# EAGLE board speakers2 (EAGLE 5.07)
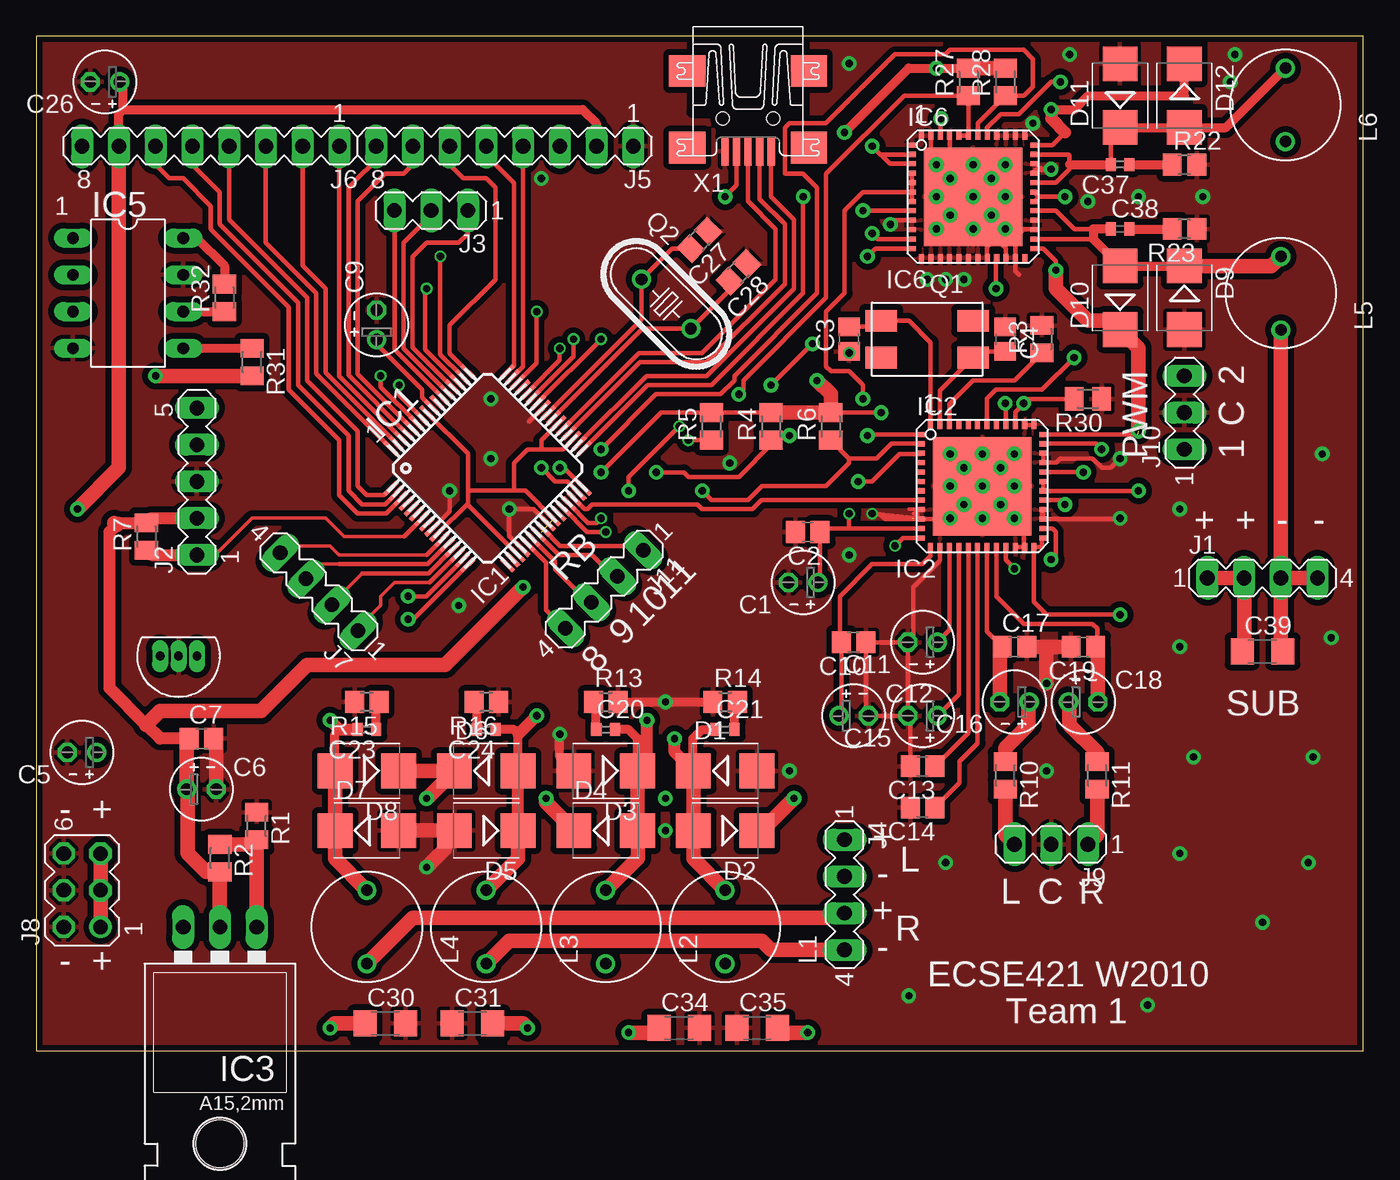
[diagram p0: board, top side]
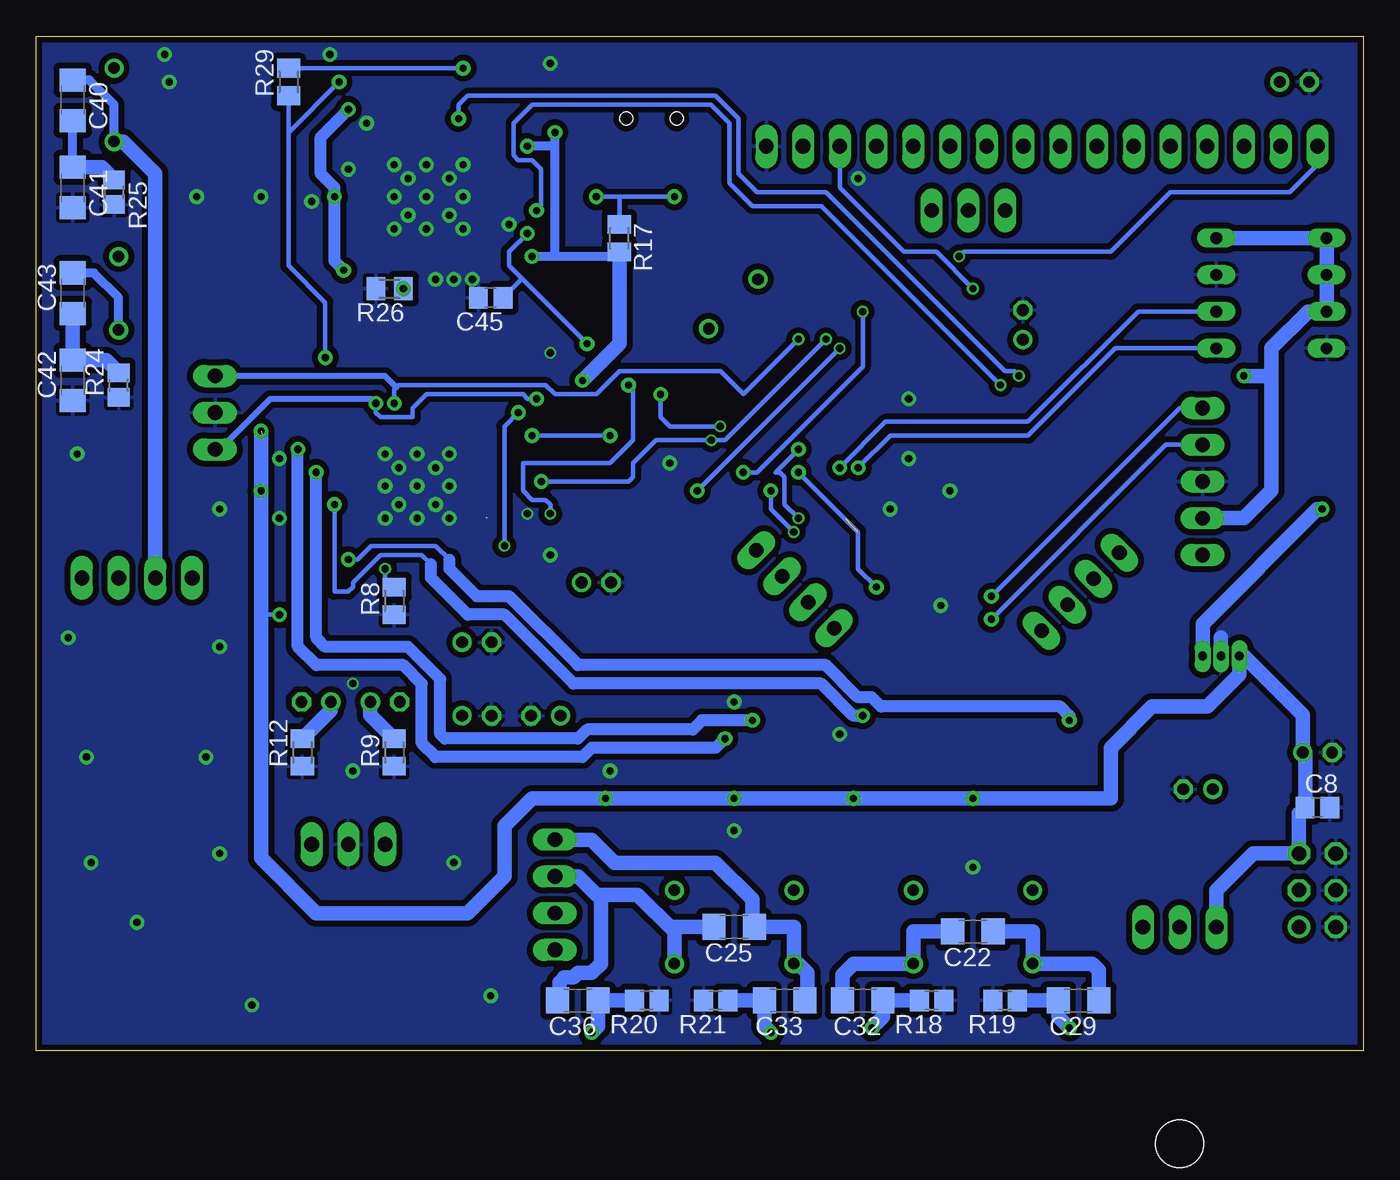
[diagram p1: board, bottom side, seen from below]

Size 91.75 x 70.16 mm. Coordinates in mm from the lower left corner, seen from the top.
Outline: 0,0 91.75,0 91.75,70.16 0,70.16 0,0
Copper layers (1*16): Top 0.035mm / dielectric 1.5mm / Bottom 0.035mm
Design rules "Fusion_eagle_rule_v1.1": minimum track width 6mil, minimum drill 12mil, track to track 6mil, track to pad 6mil, pad to pad 6mil, via to via 6mil, smd to smd 0mil, copper to edge 10mil, drill to drill 10mil, minimum pad ring 10mil, minimum via ring 6mil, stop-mask expansion 2mil, vias tented up to drill 100mil, thermal gap 10mil

## Footprints (pad centres in the part's own frame; a part is rotated, then mirrored left to right if it is on the bottom)
E2-4 = drill 0.813 pad 1.27 round: + -1.016,0 | drill 0.813 pad 1.27 octagon: - 1.016,0
C0805 = smd 1.3 x 1.5: 1 -0.85,0; 2 0.85,0
C0402 = smd 0.7 x 0.9: 1 -0.65,0; 2 0.65,0
C3216 = smd 1.6 x 1.8: 1 -1.4,0; 2 1.4,0
SMB = smd 2.4 x 2.4: A 2.2,0; C -2.2,0
TQFP64-10X10 = smd 1.2 x 0.3: 1 -5.7,3.75; 2 -5.7,3.25; 3 -5.7,2.75; 4 -5.7,2.25; 5 -5.7,1.75; 6 -5.7,1.25; 7 -5.7,0.75; 8 -5.7,0.25; 9 -5.7,-0.25; 10 -5.7,-0.75; 11 -5.7,-1.25; 12 -5.7,-1.75; 13 -5.7,-2.25; 14 -5.7,-2.75; 15 -5.7,-3.25; 16 -5.7,-3.75; 33 5.7,-3.75; 34 5.7,-3.25; 35 5.7,-2.75; 36 5.7,-2.25; 37 5.7,-1.75; 38 5.7,-1.25; 39 5.7,-0.75; 40 5.7,-0.25; 41 5.7,0.25; 42 5.7,0.75; 43 5.7,1.25; 44 5.7,1.75; 45 5.7,2.25; 46 5.7,2.75; 47 5.7,3.25; 48 5.7,3.75 | smd 0.3 x 1.2: 17 -3.75,-5.7; 18 -3.25,-5.7; 19 -2.75,-5.7; 20 -2.25,-5.7; 21 -1.75,-5.7; 22 -1.25,-5.7; 23 -0.75,-5.7; 24 -0.25,-5.7; 25 0.25,-5.7; 26 0.75,-5.7; 27 1.25,-5.7; 28 1.75,-5.7; 29 2.25,-5.7; 30 2.75,-5.7; 31 3.25,-5.7; 32 3.75,-5.7; 49 3.75,5.7; 50 3.25,5.7; 51 2.75,5.7; 52 2.25,5.7; 53 1.75,5.7; 54 1.25,5.7; 55 0.75,5.7; 56 0.25,5.7; 57 -0.25,5.7; 58 -0.75,5.7; 59 -1.25,5.7; 60 -1.75,5.7; 61 -2.25,5.7; 62 -2.75,5.7; 63 -3.25,5.7; 64 -3.75,5.7
QFN48-9X9 = smd 0.55 x 0.35: 1 -4.225,3.575; 2 -4.225,2.925; 3 -4.225,2.275; 4 -4.225,1.625; 5 -4.225,0.975; 6 -4.225,0.325; 7 -4.225,-0.325; 8 -4.225,-0.975; 9 -4.225,-1.625; 10 -4.225,-2.275; 11 -4.225,-2.925; 12 -4.225,-3.575; 25 4.225,-3.575; 26 4.225,-2.925; 27 4.225,-2.275; 28 4.225,-1.625; 29 4.225,-0.975; 30 4.225,-0.325; 31 4.225,0.325; 32 4.225,0.975; 33 4.225,1.625; 34 4.225,2.275; 35 4.225,2.925; 36 4.225,3.575 | smd 0.35 x 0.55: 13 -3.575,-4.225; 14 -2.925,-4.225; 15 -2.275,-4.225; 16 -1.625,-4.225; 17 -0.975,-4.225; 18 -0.325,-4.225; 19 0.325,-4.225; 20 0.975,-4.225; 21 1.625,-4.225; 22 2.275,-4.225; 23 2.925,-4.225; 24 3.575,-4.225; 37 3.575,4.225; 38 2.925,4.225; 39 2.275,4.225; 40 1.625,4.225; 41 0.975,4.225; 42 0.325,4.225; 43 -0.325,4.225; 44 -0.975,4.225; 45 -1.625,4.225; 46 -2.275,4.225; 47 -2.925,4.225; 48 -3.575,4.225 | smd 6.8 x 6.8: EPAD 0,0
TO220L1 = drill 1.016 long: 1 -2.54,-3.81; 2 0,-3.81; 3 2.54,-3.81 | hole 3.302: 0,11.176
TO-92 = drill 0.6 pad 0.813 long: 1 -1.27,0; 2 0,0; 3 1.27,0
DIL8 = drill 0.813 long: 1 -3.81,-3.81; 2 -1.27,-3.81; 3 1.27,-3.81; 4 3.81,-3.81; 5 3.81,3.81; 6 1.27,3.81; 7 -1.27,3.81; 8 -3.81,3.81
MA04-1 = drill 1.016 long: 1 -3.81,0; 2 -1.27,0; 3 1.27,0; 4 3.81,0
MA05-1 = drill 1.016 long: 1 -5.08,0; 2 -2.54,0; 3 0,0; 4 2.54,0; 5 5.08,0
MA03-1 = drill 1.016 long: 1 -2.54,0; 2 0,0; 3 2.54,0
MA08-1 = drill 1.016 long: 1 -8.89,0; 2 -6.35,0; 3 -3.81,0; 4 -1.27,0; 5 1.27,0; 6 3.81,0; 7 6.35,0; 8 8.89,0
MA03-2 = drill 1.016 round: 1 -2.54,-1.27 | drill 1.016 octagon: 2 -2.54,1.27; 3 0,-1.27; 4 0,1.27; 5 2.54,-1.27; 6 2.54,1.27
RLB9012 = drill 0.8 round: 1 0,2.54; 2 0,-2.54
12SMX-B = smd 2.2 x 1.5: P$1 -3.175,1.27; P$2 -3.175,-1.27; P$3 3.175,-1.27; P$4 3.175,1.27
HC49U-V = drill 0.813 round: 1 -2.413,0; 2 2.413,0
M0805 = smd 1.3 x 1.6: 1 -0.95,0; 2 0.95,0
R0805 = smd 1.3 x 1.5: 1 -0.85,0; 2 0.85,0
UX60-MB-5ST = smd 2 x 0.5: 1 2.25,1.6; 2 2.25,0.8; 3 2.25,0; 4 2.25,-0.8; 5 2.25,-1.6 | smd 2.2 x 2.5: M1 -3.3,-4.2; M2 -3.3,4.2; M3 2,4.2; M4 2,-4.2 | hole 0.9: 0,-1.75; 0,1.75

## Placement (x,y rotation side)
C1  [E2-4]  53.02,32.38 180 top
C2  [C0805]  53.34,35.88 180 top
C3  [C0805]  56.2,49.21 90 top
C4  [C0805]  66.99,49.21 270 top
C5  [E2-4]  3.17,20.64 180 top
C6  [E2-4]  11.43,18.1 0 top
C7  [C0805]  11.43,21.59 0 top
C8  [C0805]  3.17,16.83 0 bottom
C9  [E2-4]  23.53,50.2 90 top
C10  0.1u  [C0805]  56.52,28.26 180 top
C11  10u  [E2-4]  61.28,28.26 180 top
C12  10u  [E2-4]  56.52,23.18 0 top
C13  150p  [C0805]  61.28,19.68 180 top
C14  150p  [C0805]  61.28,16.83 180 top
C15  1u  [E2-4]  61.28,23.18 180 top
C16  1u  [E2-4]  67.63,24.13 180 top
C17  100p  [C0805]  67.63,27.94 0 top
C18  1u  [E2-4]  72.39,24.13 0 top
C19  100p  [C0805]  72.39,27.94 180 top
C20  680p  [C0402]  39.37,22.23 0 top
C21  680p  [C0402]  47.62,22.23 0 top
C22  [C3216]  26.99,8.26 180 bottom
C23  680p  [C0402]  22.86,22.23 180 top
C24  680p  [C0402]  31.11,22.23 180 top
C25  [C3216]  43.5,8.57 180 bottom
C26  [E2-4]  4.76,66.99 180 top
C27  [C0805]  45.85,56.07 225 top
C28  [C0805]  48.54,53.83 225 top
C29  0.1u  [C3216]  19.68,3.49 180 bottom
C30  0.1u  [C3216]  24.13,1.91 0 top
C31  0.1u  [C3216]  30.16,1.91 0 top
C32  0.1u  [C3216]  34.61,3.49 180 bottom
C33  0.1u  [C3216]  40.01,3.49 180 bottom
C34  0.1u  [C3216]  44.45,1.59 0 top
C35  0.1u  [C3216]  49.85,1.59 0 top
C36  0.1u  [C3216]  54.29,3.49 180 bottom
C37  680p  [C0402]  74.93,61.28 180 top
C38  680p  [C0402]  74.93,56.83 0 top
C39  [C3216]  84.77,27.62 0 top
C40  0.1u  [C3216]  89.22,65.72 270 bottom
C41  0.1u  [C3216]  89.22,59.69 270 bottom
C42  0.1u  [C3216]  89.22,46.35 90 bottom
C43  0.1u  [C3216]  89.22,52.39 90 bottom
C45  [C0805]  60.33,52.07 180 bottom
D1  [SMB]  47.62,19.37 0 top
D2  [SMB]  47.62,15.24 180 top
D3  [SMB]  39.37,19.37 180 top
D4  [SMB]  39.37,15.24 0 top
D5  [SMB]  31.11,15.24 180 top
D6  [SMB]  31.11,19.37 0 top
D7  [SMB]  22.86,15.24 0 top
D8  [SMB]  22.86,19.37 180 top
D9  [SMB]  79.38,52.07 270 top
D10  [SMB]  74.93,52.07 90 top
D11  [SMB]  74.93,66.04 90 top
D12  [SMB]  79.38,66.04 270 top
IC1  PIC32MX695F512H  [TQFP64-10X10]  31.21,40.28 45 top
IC2  CS4525  [QFN48-9X9]  65.41,39.05 0 top
IC3  LM317MBTG  [TO220L1]  12.7,4.76 180 top
IC4  78XX-TO92  [TO-92]  9.84,27.3 180 top
IC5  24FC1025  [DIL8]  6.35,52.39 270 top
IC6  CS4412  [QFN48-9X9]  64.77,59.05 0 top
J1  [MA04-1]  84.77,32.7 0 top
J2  [MA05-1]  11.11,39.37 90 top
J3  [MA03-1]  27.3,58.1 180 top
J4  [MA04-1]  55.88,10.79 270 top
J5  [MA08-1]  32.38,62.55 180 top
J6  [MA08-1]  12.06,62.55 180 top
J7  [MA04-1]  19.55,31.75 135 top
J8  [MA03-2]  3.17,11.11 90 top
J9  [MA03-1]  70.17,14.29 180 top
J10  [MA03-1]  79.38,44.13 90 top
J11  [MA04-1]  39.28,31.92 225 top
L1  RLB9012  [RLB9012]  47.62,8.57 0 top
L2  RLB9012  [RLB9012]  39.37,8.57 0 top
L3  RLB9012  [RLB9012]  31.11,8.57 0 top
L4  RLB9012  [RLB9012]  22.86,8.57 0 top
L5  RLB9012  [RLB9012]  86.04,52.39 0 top
L6  RLB9012  [RLB9012]  86.36,65.41 0 top
Q1  24.576  [12SMX-B]  61.59,49.21 180 top
Q2  8MHz  [HC49U-V]  43.55,51.64 315 top
R1  [M0805]  15.24,15.56 270 top
R2  [M0805]  12.7,13.34 270 top
R3  22k  [M0805]  69.53,49.21 90 top
R4  22k  [M0805]  50.8,43.18 90 top
R5  2k  [M0805]  46.67,43.18 90 top
R6  2k  [M0805]  54.93,43.18 90 top
R7  10k  [M0805]  7.62,35.56 90 top
R8  16.8k  [M0805]  66.99,31.11 90 bottom
R9  5.6k  [M0805]  66.99,20.64 90 bottom
R10  8k  [M0805]  66.99,19.05 270 top
R11  8k  [M0805]  73.34,19.05 270 top
R12  5.6k  [M0805]  73.34,20.64 90 bottom
R13  5.6  [R0805]  39.37,24.13 0 top
R14  5.6  [R0805]  47.62,24.13 0 top
R15  5.6  [R0805]  22.86,24.13 180 top
R16  5.6  [R0805]  31.11,24.13 180 top
R17  10k  [M0805]  51.44,56.2 270 bottom
R18  6.2  [R0805]  29.84,3.49 180 bottom
R19  6.2  [R0805]  24.77,3.49 180 bottom
R20  6.2  [R0805]  49.53,3.49 180 bottom
R21  6.2  [R0805]  44.77,3.49 180 bottom
R22  5.6  [R0805]  79.38,61.28 0 top
R23  5.6  [R0805]  79.38,56.83 180 top
R24  6.2  [R0805]  86.04,46.04 90 bottom
R25  6.2  [R0805]  86.36,59.37 270 bottom
R26  16.8k  [M0805]  67.31,52.7 180 bottom
R27  22k  [M0805]  64.45,66.99 90 top
R28  22k  [M0805]  66.99,66.99 90 top
R29  22k  [M0805]  74.3,66.99 90 bottom
R30  22k  [M0805]  72.71,45.09 180 top
R31  2k  [M0805]  14.92,47.62 270 top
R32  2k  [M0805]  13.02,52.07 90 top
X1  MINI-USB-SHIELD-UX60-MB-5ST  [UX60-MB-5ST]  49.21,64.45 270 top

## Library data of the parts
C1-C43 C45 R1-R32 = resistor
D1-D12 = diode
IC1 IC2 IC4-IC6 L1-L6 Q1 = bnahill
IC3 = v-reg
J1-J11 = con-lstb
Q2 = crystal
X1 = con-hirose

## Nets
3.3V: C6.+ C7.1 IC1.10 IC1.19 IC1.26 IC1.35 IC1.38 IC1.57 IC2.12 IC3.2 IC5.1 IC5.2 IC5.3 IC5.8 IC6.2 IC6.3 IC6.12 J2.2 R2.2 R4.2 R5.2 R6.2 R7.2 R17.2 R27.2 R28.2 R29.2 R31.2 R32.2
5V: C26.+ IC4.1 J5.2 J6.7
AINL: C16.- C17.1 IC2.19
AINR: C18.- C19.1 IC2.20
AN2: IC1.14 J7.1
AN3: IC1.13 J7.2
AN4: IC1.12 J7.3
AN5: IC1.11 J7.4
E2_SCL: IC1.32 IC5.6 R32.1
E2_SDA: IC1.31 IC5.5 R31.1
GND: C1.- C2.2 C3.1 C4.1 C5.- C6.- C7.2 C8.2 C9.- C10.1 C11.- C12.- C13.2 C14.2 C15.- C17.2 C19.2 C26.- C27.1 C28.1 C30.2 C31.1 C34.2 C35.1 C41.2 C42.1 C45.2 D1.A D3.A D5.A D7.A D9.A D11.A IC1.9 IC1.20 IC1.25 IC1.41 IC2.9 IC2.10 IC2.14 IC2.22 IC2.23 IC2.27 IC2.28 IC2.33 IC2.34 IC2.37 IC2.38 IC2.EPAD IC4.2 IC5.4 IC5.7 IC6.1 IC6.9 IC6.10 IC6.13 IC6.14 IC6.15 IC6.16 IC6.17 IC6.18 IC6.19 IC6.20 IC6.22 IC6.23 IC6.27 IC6.28 IC6.33 IC6.34 IC6.37 IC6.38 IC6.39 IC6.40 IC6.45 IC6.47 IC6.48 IC6.EPAD J2.3 J5.1 J8.2 J8.4 J8.6 J9.2 J10.2 R1.1 R3.2 R8.1 R9.1 R12.1 R13.2 R14.1 R15.2 R16.1 R18.1 R19.2 R20.1 R21.2 R22.2 R23.1 R24.1 R25.2 R26.2 R30.1 X1.5
IC_RST: IC1.30 IC2.8
INL: J9.3 R10.2
INR: J9.1 R11.2
INT: IC1.46 IC2.1 R4.1
LCD_BKLIGHT: IC1.50 J6.8
LCD_CONT: IC1.51 J5.3
LCD_DAT0: IC1.60 J5.7
LCD_DAT1: IC1.61 J5.8
LCD_DAT2: IC1.62 J6.1
LCD_DAT3: IC1.63 J6.2
LCD_DAT4: IC1.64 J6.3
LCD_DAT5: IC1.1 J6.4
LCD_DAT6: IC1.2 J6.5
LCD_DAT7: IC1.3 J6.6
LCD_E: IC1.49 J5.6
LCD_RS: IC1.47 J5.4
LCD_RW: IC1.48 J5.5
MCLR: IC1.7 J2.1 R7.1
N$1: IC2.46 R3.1
N$2: C11.+ IC2.15
N$3: C21.2 R14.2
N$4: C10.2 C12.+ IC2.13
N$5: C15.+ IC2.16
N$6: C13.1 IC2.17
N$7: C14.1 IC2.18
N$8: C20.1 R13.1
N$9: C4.2 IC2.47 Q1.P$1
N$10: C3.2 IC2.48 Q1.P$3
N$11: IC3.1 R1.2 R2.1
N$12: C27.2 IC1.40 Q2.1
N$14: C16.+ R9.2 R10.1
N$15: C18.+ R11.1 R12.2
N$16: C28.2 IC1.39 Q2.2
N$17: C29.2 C30.1 R19.1
N$18: C37.1 R22.1
N$20: C23.1 R15.1
N$23: C24.2 R16.2
N$24: C31.2 C32.1 R18.2
N$26: C33.2 C34.1 R21.1
N$27: C35.2 C36.1 R20.2
N$28: C38.2 R23.2
N$30: C40.2 C41.1 R25.1
N$31: C42.2 C43.1 R24.2
N$32: IC2.21 R8.2
N$43: IC6.21 R26.1
N$52: IC6.24
OUT1: C21.1 D1.C D2.A IC2.35 L1.1
OUT2: C20.2 D3.C D4.A IC2.32 L2.1
OUT3: C24.1 D5.C D6.A IC2.29 L3.1
OUT4: C23.2 D7.C D8.A IC2.26 L4.1
OUTL+: C25.1 C33.1 J4.1 L2.2
OUTL-: C25.2 C36.2 J4.2 L1.2
OUTR+: C22.1 C29.1 J4.3 L4.2
OUTR-: C22.2 C32.2 J4.4 L3.2
OUTSUB+: C39.1 C40.1 J1.1 J1.2 L6.2
OUTSUB-: C39.2 C43.2 J1.3 J1.4 L5.2
PGC1: IC1.15 J2.5
PGD1: IC1.16 J2.4
PWM_SIG1: IC1.42 IC2.40 J10.3
PWM_SIG2: IC2.39 IC6.4 IC6.5 IC6.6 IC6.7 J10.1 R30.2
RB8: IC1.21 J11.4
RB9: IC1.22 J11.3
RB10: IC1.23 J11.2
RB11: IC1.24 J11.1
RD4: IC1.52 J3.1
RD5: IC1.53 J3.2
RD6: IC1.54 J3.3
SCL: IC1.44 IC2.2 R6.1
SDA: IC1.43 IC2.3 R5.1
SUB+: C37.2 D11.C D12.A IC6.32 IC6.35 L6.1
SUB-: C38.1 D9.C D10.A IC6.26 IC6.29 L5.1
SUB_ERROC: IC1.28 IC6.43 IC6.44 R27.1
SUB_ERRUVTE: IC1.29 IC6.42 R28.1
SUB_RST12: IC1.58 IC6.8
SUB_RST34: IC1.59 IC6.46
SUB_TWR: IC2.42 IC6.41 R29.1
USBD+: IC1.37 X1.3
USBD-: IC1.36 X1.2
USBID: IC1.33 R17.1 X1.4
VBUS: IC1.34 X1.1
VD_REG: C1.+ C2.1 C45.1 IC2.11 IC6.11
VDDCORE: C9.+ IC1.56
VIN: C5.+ C8.1 D2.C D4.C D6.C D8.C D10.C D12.C IC2.24 IC2.25 IC2.30 IC2.31 IC2.36 IC3.3 IC4.3 IC6.25 IC6.30 IC6.31 IC6.36 J8.1 J8.3 J8.5

## Tracks (layer width: path | path; a pad name or v marks a point on that pad's centre or on a via)
3.3V  (via drill 0.5, 0.5 pad 1.02)  (1 unrouted)
  Top 0.305: R6.2 v58.42,44.13 | v59.37,34.92 59.92,35.48 IC2.12 | IC1.57 29.84,41.29 29.84,38.73 | IC1.10 29.84,37.86 | 29.84,37.86 29.84,38.73 | IC1.19 29.84,37.76 29.84,37.86 | IC1.26 33.82,38.73 33.02,38.73 | 29.84,38.73 33.02,38.73 | IC1.35 36.41,41.59 34.92,41.59 | 34.92,41.59 33.97,41.59 33.02,40.64 33.02,38.73 | IC1.38 34.92,42.23 34.92,41.59 | v39.05,40.01 43.18,44.13 R5.2 R4.2 | IC6.12 58.02,55.48 v57.47,54.93 | IC6.2 58.35,61.98 v57.78,62.55 59,61.33 IC6.3 | R27.2
  Top 0.61: R27.2 v62.23,67.94 60.33,67.94 v55.88,63.5 | IC5.8 11.11,56.2 13.02,54.29 R32.2
  Top 0.813: J2.2 7.94,36.83 R7.2 5.71,36.51 5.56,36.35 5.08,35.88 5.08,25.08 7.62,22.54 8.57,21.59 C7.1
  Top 1.016: IC3.2 R2.2 11.74,12.38 10.48,13.65 10.48,18.03 C6.+ 10.41,21.42 C7.1 | 5.56,36.35 5.4,36.51 | 7.62,22.54 8.57,23.5 15.56,23.5 18.73,26.67 28.26,26.67 v33.66,32.07 | R4.2 R6.2 54.93,45.4 v53.98,46.35 | R27.2 R28.2 | R31.2 v8.26,46.67
  Bottom 0.305: v58.42,44.13 59.37,43.18 v59.37,34.92 | v39.05,40.01 34.92,35.88 34.92,33.34 v33.66,32.07 | R29.2 v62.23,67.94
  Bottom 0.61: 55.88,54.93 55.88,62.55 | 55.88,62.55 v55.88,63.5 | 55.88,62.55 v57.78,62.55 | 55.88,54.93 51.76,54.93 R17.2 | 55.88,54.93 v57.47,54.93
  Bottom 1.016: IC5.8 IC5.1 IC5.2 IC5.3 3.81,51.12 6.35,48.58 6.35,46.67 | 6.35,46.67 6.35,38.73 8.26,36.83 J2.2 | v53.98,46.35 51.44,48.9 R17.2 | 6.35,46.67 v8.26,46.67
5V  (via drill 0.5 pad 1.02)
  Top 0.61: J6.7 5.71,64.77 6.03,65.09 | 6.03,65.09 37.78,65.09 38.73,64.14 J5.2 | C26.+ 6.03,66.74 6.03,65.09
  Top 1.016: J6.7 5.71,40.32 v2.86,37.47
  Bottom 1.016: v2.86,37.47 3.17,37.47 11.11,29.53 IC4.1
AINL
  Top 0.305: IC2.19 65.73,28.99 C17.1
  Top 1.016: C16.- 66.61,27.77 C17.1
AINR
  Top 0.305: IC2.20 66.38,31.41 68.26,29.53 73.03,29.53 73.34,29.21 73.34,28.04 C19.1
  Top 1.016: C18.- 73.41,27.77 C19.1
AN2
  Top 0.254: 27.2,32.38 24.77,32.38 23.81,31.43 23.81,30.8 22.25,29.23 J7.1
  Top 0.305: 27.2,32.38 IC1.14
AN3
  Top 0.254: 22.54,33.02 20.45,30.93 J7.2
  Top 0.305: IC1.13 27.13,33.02 22.54,33.02
AN4
  Top 0.254: 20.95,33.66 19.68,33.66 18.68,32.65 J7.3
  Top 0.305: IC1.12 27.05,33.66 20.95,33.66
AN5
  Top 0.254: 26.98,34.29 20.95,34.29 20.32,34.92 17.46,34.92 16.98,34.44 J7.4
  Top 0.305: 26.98,34.29 IC1.11
E2_SCL  (via drill 0.5 pad 1.02)
  Top 0.305: IC1.32 36.47,40.32 v36.2,40.32
  Top 0.61: R32.1 IC5.6
  Bottom 0.305: v36.2,40.32 33.02,43.5 23.18,43.5 15.56,51.12 IC5.6
E2_SDA  (via drill 0.5 pad 1.02)
  Top 0.305: IC1.31 36.72,39.37 35.88,39.37 v34.92,40.32
  Top 0.61: R31.1 IC5.5
  Bottom 0.305: v34.92,40.32 32.7,42.55 23.18,42.55 17.14,48.58 IC5.5
GND  (via drill 0.5, 0.5 pad 0.61, 0.5 pad 1.02)  (1 unrouted)
  Top 0.254: 60.33,37.47 60.96,37.47 60.64,37.15 60.96,37.15 | 60.64,36.83 60.96,37.15 | 60.96,37.15 60.96,36.83
  Top 0.305: 69.53,36.83 69.53,37.33 IC2.28 IC2.27 74.88,36.78 v74.93,36.83 | IC2.34 IC2.33 70.52,40.68 70.8,40.96 73.03,40.96 73.66,40.32 74.3,40.32 v74.93,40.96 74.65,40.68 | IC2.38 IC2.37 | IC1.41 34.07,43.5 | IC2.23 IC2.22 68.17,34.83 68.26,34.92 68.26,36.78 67.68,36.78 IC2.EPAD 63.13,36.78 IC2.10 58.68,36.78 58.38,37.08 | C12.- 57.37,23.34 C10.1 59.69,28.26 | C11.- 59.69,28.26 | C15.- C11.- | C15.- 57.47,23.18 | C13.2 60.43,23.01 C15.- | 59.69,28.26 59.62,28.32 | IC2.14 62.48,33.91 60.64,32.07 60.64,28.64 C11.- | v57.78,37.15 58.38,37.08 | 58.38,37.08 60.58,36.83 | IC1.9 28.57,37.3 v28.57,38.73 | IC1.20 32.7,35.61 v32.7,37.47 34.38,37.47 IC1.25 | 67.94,53.66 67.69,53.91 IC6.23 67.69,56.27 68.26,56.83 68.94,56.83 IC6.27 | IC6.22 67.05,55.51 66.36,56.2 | 66.36,56.2 65.72,55.56 65.72,54.85 IC6.20 | 66.36,56.2 66.36,57.47 IC6.EPAD 63.18,60.64 63.18,61.59 | IC6.9 59.02,57.43 v59.05,57.15 | v70.17,60.96 69.53,60.96 69.28,60.96 arc90 IC6.33 | 63.18,61.59 63.15,61.63 63.18,61.67 63.18,63.18 63.15,63.22 IC6.45 | 63.18,61.59 61.91,61.59 61.84,61.66 IC6.47
  Top 0.406: 69.53,60.96 69.22,60.96
  Top 0.61: 40.32,24.23 R13.2 v43.5,24.13 R14.1 | D3.A 36.2,20.34 v36.2,21.91
  Top 1.016: D7.A 28.26,15.24 | 28.26,15.24 D5.A | C6.- 12.45,21.42 C7.2 | v26.99,12.7 28.26,13.97 28.26,15.24 | C17.2 69.85,27.94 | 69.85,27.94 C19.2 | 69.85,27.94 v69.85,25.4
  Bottom 1.016: 9.84,26.67 9.84,28.57
  other vias: 52.07,19.37 31.43,45.09 31.43,40.96 61.59,53.34 62.87,53.34 64.14,53.34 68.9,64.14 71.44,68.9 82.87,68.9 56.2,48.26 62.23,56.83 66.99,56.83 66.99,61.28 62.23,61.28 64.77,59.05 64.77,56.83 62.23,59.05 66.99,59.05 64.77,61.28 63.18,60.33 63.18,57.78 66.04,57.78 66.04,60.33 65.41,39.05 67.63,41.27 63.18,41.27 63.18,36.83 67.63,36.83 67.63,39.05 63.18,39.05 65.41,41.27 65.41,36.83 66.67,37.78 66.67,40.32 64.14,40.32 64.14,37.78 80.01,20.32 88.27,20.32 88.9,41.27 79.06,37.47 72.71,58.74 76.2,59.05 80.64,59.05 82.55,66.99 56.2,68.26 47.94,40.64 29.21,30.8 34.92,60.33 43.5,15.24 56.2,34.29 84.77,8.89 76.83,3.17 60.33,3.81 62.87,13.02 69.85,19.37 79.06,27.94 89.53,28.57 79.06,13.65 87.95,13.02
  pour Bottom (isolate 0.406): 0,70.17 91.76,70.17 91.76,0 0,0
  pour Top (isolate 0.406): 0,70.17 91.76,70.17 91.76,0 0,0
IC_RST
  Top 0.305: IC2.8 50.14,38.08 49.53,37.47 46.04,37.47 45.72,37.78 38.42,37.78 38.1,37.47 37.92,37.47 IC1.30
INL
  Top 1.016: R10.2 66.99,14.92 J9.3
INR
  Top 1.016: J9.1 73.34,14.92 R11.2
INT  (via drill 0.5, 0.5 pad 1.02)
  Top 0.305: IC2.1 57.87,42.63 57.78,42.55 v57.47,42.55 | IC1.46 34.61,47.57 v34.61,51.12 | v42.86,40.01 44.77,40.01 45.09,39.69 48.58,39.69 50.8,41.91 R4.1 51.12,42.55 v52.07,42.55
  Bottom 0.305: v34.61,51.12 34.61,47.31 41.91,40.01 v42.86,40.01 | v52.07,42.55 v57.47,42.55
LCD_BKLIGHT  (via drill 0.5)
  Top 0.305: IC1.50 27.94,48.15 v27.94,54.93
  Bottom 0.305: v27.94,54.93 27.62,55.24 17.46,55.24 13.34,59.37 5.08,59.37 3.17,61.28 J6.8
LCD_CONT  (via drill 0.5)
  Top 0.305: IC1.51 26.89,48.49 26.89,52.61 v26.99,52.7
  Bottom 0.305: J5.3 36.2,59.69 31.75,55.24 29.53,55.24 v26.99,52.7
LCD_DAT0
  Top 0.305: J5.7 26.04,61.28 25.4,60.64 24.13,60.64 22.23,58.74 22.23,46.79 IC1.60
LCD_DAT1
  Top 0.305: J5.8 23.5,61.59 22.07,60.17 21.91,60.01 21.59,59.69 21.59,46.72 IC1.61
LCD_DAT2
  Top 0.305: IC1.62 20.95,46.65 J6.1
LCD_DAT3
  Top 0.305: IC1.63 20,46.89 20,52.7 18.41,54.29 J6.2
LCD_DAT4
  Top 0.305: IC1.64 19.37,46.82 19.37,52.39 15.88,55.88 J6.3
LCD_DAT5
  Top 0.305: IC1.1 24.04,38.42 22.86,38.42 22.23,39.05 22.23,42.86 18.73,46.35 18.73,52.07 13.34,57.47 J6.4
LCD_DAT6
  Top 0.305: IC1.2 24.11,37.78 22.54,37.78 21.59,38.73 21.59,42.55 18.1,46.04 18.1,51.75 12.7,57.15 12.7,59.37 10.79,61.28 J6.5
LCD_DAT7
  Top 0.305: IC1.3 24.18,37.15 22.23,37.15 20.95,38.42 20.95,42.23 17.46,45.72 17.46,51.44 12.06,56.83 12.06,58.42 10.16,60.33 9.21,60.33 8.26,61.28 J6.6
LCD_E
  Top 0.305: IC1.49 28.57,48.22 28.57,50.16 31.75,53.34 31.75,59.69 31.11,60.33 29.53,60.33 28.57,61.28 J5.6
LCD_RS
  Top 0.305: IC1.47 33.66,47.33 J5.4
LCD_RW
  Top 0.305: IC1.48 33.02,47.4 33.02,60.01 31.11,61.91 J5.5
MCLR
  Top 0.254: 25.42,35.56 21.27,35.56 20,36.83 14.92,36.83 12.38,34.29 J2.1
  Top 0.305: 25.42,35.56 IC1.7
  Top 0.813: J2.1 7.94,34.29 R7.1
N$1
  Top 0.305: IC2.46 63.13,44.72 64.77,46.35 67.62,46.35 R3.1
N$2
  Top 0.305: IC2.15 63.13,29.09 C11.+
N$3
  Top 0.61: C21.2 48.27,23.93 R14.2
N$4
  Top 0.305: C12.+ 55.66,23.34 C10.2 55.56,28.36 55.56,31.43 57.78,33.66 61.28,33.66 61.83,34.21 IC2.13
N$5
  Top 0.305: IC2.16 63.78,24.66 C15.+
N$6
  Top 0.305: IC2.17 64.43,21.99 C13.1
N$7
  Top 0.305: IC2.18 65.08,21.27 63.82,20 63.82,18.52 C14.1
N$8
  Top 0.61: C20.1 38.72,23.93 R13.1
N$9
  Top 0.305: C4.2 65.19,48.36 Q1.P$1 62.48,45.65 IC2.47
N$10
  Top 0.305: IC2.48 61.83,48.98 60.33,50.48 Q1.P$3 58,50.06 C3.2
N$11
  Top 1.016: IC3.1 R1.2 14.92,14.29 R2.1
N$12
  Top 0.305: C27.2 43.96,55.47 Q2.1 41.85,50.57 IC1.40
N$14
  Top 1.016: R10.1 66.99,20.95 68.58,22.54 68.58,24.07 C16.+
  Bottom 1.016: R9.2 68.64,23.24 C16.+
N$15
  Top 1.016: R11.1 73.34,20.64 71.44,22.54 71.44,24.07 C18.+
  Bottom 1.016: C18.+ 71.37,23.56 R12.2
N$16
  Top 0.305: C28.2 47.94,52.62 Q2.2 41.92,49.94 IC1.39
N$17  (via drill 0.5 pad 1.02)
  Top 1.016: C30.1 20.64,1.91 v20.32,1.59
  Bottom 1.016: R19.1 C29.2 21.09,2.35 v20.32,1.59
N$18
  Top 0.61: C37.1 R22.1
N$20
  Top 0.61: C23.1 23.51,23.93 R15.1
N$23
  Top 0.61: C24.2 30.46,23.93 R16.2
N$24  (via drill 0.5 pad 1.02)
  Top 1.016: C31.2 33.66,1.91 v33.97,1.59
  Bottom 1.016: R18.2 C32.1 33.21,2.35 v33.97,1.59
N$26  (via drill 0.5 pad 1.02)
  Top 1.016: C34.1 42.73,1.27 v40.96,1.27
  Bottom 1.016: R21.1 C33.2 41.41,1.72 v40.96,1.27
N$27  (via drill 0.5 pad 1.02)
  Top 1.016: C35.2 51.56,1.27 v53.34,1.27
  Bottom 1.016: R20.2 C36.1 52.89,1.72 v53.34,1.27
N$28
  Top 0.61: C38.2 R23.2
N$30
  Bottom 0.61: C41.1 C40.2
  Bottom 1.016: C41.1 87.23,61.09 R25.1
N$31
  Bottom 1.016: R24.2 86.91,47.76 C42.2 C43.1
N$32  (via drill 0.5)
  Top 0.305: IC2.21 67.03,33.94 v67.63,33.34
  Bottom 0.305: v67.63,33.34 67.63,32.7 R8.2
N$43  (via drill 0.5 pad 1.02)  (1 unrouted)
  Top 0.305: R26.1 66.36,54.79 IC6.21
  other vias: 66.36,52.7
OUT1  (via drill 0.5 pad 1.02)
  Top 0.305: IC2.35 73.28,41.98 v73.66,41.59
  Top 0.61: C21.1 46.04,22.23 45.4,21.59 45.4,19.39 D1.C
  Top 0.813: v44.13,21.59 44.13,20.66 D1.C
  Top 1.016: D1.C D2.A 45.42,13.31 L1.1
  Bottom 0.813: v73.66,41.59 73.66,27.94 72.39,26.67 66.36,26.67 65.09,25.4 65.09,21.27 64.14,20.32 53.98,20.32 53.34,20.95 44.77,20.95 v44.13,21.59
OUT2  (via drill 0.5 pad 1.02)
  Top 0.305: IC2.32 72.37,40.03 v72.39,40.01
  Top 0.61: C20.2 40.96,22.23 41.57,21.61 D3.C
  Top 0.813: v42.23,22.86 42.23,20.02 D3.C
  Top 1.016: D3.C D4.A 41.59,15.22 41.59,13.34 L2.1
  Bottom 0.813: v72.39,40.01 72.39,28.57 71.75,27.94 66.04,27.94 63.82,25.72 63.82,21.91 63.5,21.59 54.29,21.59 53.66,22.23 46.35,22.23 45.72,22.86 v42.23,22.86
OUT3  (via drill 0.5 pad 1.02)
  Top 0.305: IC2.29 70.83,38.08 v71.12,37.78
  Top 0.61: C24.1 33.02,22.23 33.31,21.93 D6.A
  Top 0.813: D5.C D6.A | 33.31,21.93 33.36,21.93 v34.61,23.18
  Top 1.016: D5.C 33.31,13.31 L3.1
  Bottom 0.305: v71.12,37.78 71.12,31.75 70.17,31.75 69.85,32.07 69.85,32.38 67.94,34.29 65.09,34.29 64.45,33.66
  Bottom 0.813: v34.61,23.18 35.24,23.18 37.47,25.4 54.61,25.4 59.37,30.16 61.91,30.16 64.45,32.7 64.45,33.66
OUT4  (via drill 0.5 pad 1.02)
  Top 0.305: IC2.26 70.23,36.13 70.48,35.88 70.48,34.29 v70.17,33.97
  Top 0.61: 20.95,22.23 20.64,21.91 20.64,19.39 D8.A
  Top 0.813: C23.2 20.95,22.23 v20.32,22.86
  Top 1.016: L4.1 20.66,13.31 D7.C D8.A
  Bottom 0.305: v70.17,33.97 69.53,33.97 68.58,34.92 64.14,34.92 63.18,33.97
  Bottom 0.813: v20.32,22.86 20.32,23.18 20.95,23.81 33.34,23.81 33.97,24.45 34.92,24.45 37.15,26.67 54.29,26.67 59.05,31.43 61.28,31.43 63.18,33.34 63.18,33.97
OUTL+
  Bottom 1.016: J4.1 53.34,14.61 51.75,13.02 44.77,13.02 42.23,10.48 42.23,8.7 C25.1 39.37,8.57 L2.2 39.05,6.03 38.42,5.4 38.42,3.68 C33.1
OUTL-
  Bottom 1.016: C25.2 47.62,8.57 47.62,8.26 | 47.62,8.26 L1.2 | J4.2 54.29,12.06 53.02,10.79 52.7,10.79 | 52.7,10.79 50.16,10.79 47.62,8.26 | C36.2 55.56,3.62 55.56,4.76 55.24,5.08 54.61,5.08 54.29,5.4 53.34,5.4 52.7,6.03 52.7,10.79
OUTR+
  Top 1.016: J4.3 54.93,9.53 54.61,9.21 26.04,9.21 L4.2
  Bottom 1.016: C22.1 22.86,8.26 L4.2 18.73,6.03 18.29,5.58 C29.1
OUTR-
  Top 1.016: J4.4 50.8,6.99 50.16,7.62 32.7,7.62 L3.2
  Bottom 1.016: C22.2 31.11,8.26 L3.2 35.24,6.03 36.01,5.27 C32.2
OUTSUB+
  Top 1.016: J1.1 J1.2 83.5,27.75 C39.1
  Bottom 0.61: C40.1 88.08,67.12 86.36,65.41 L6.2
  Bottom 1.016: L6.2 85.72,62.87 83.5,60.64 J1.2
OUTSUB-
  Top 1.016: J1.3 L5.2 | J1.3 J1.4 | J1.3 86.04,27.75 C39.2
  Bottom 0.61: C43.2 87.76,53.79 86.04,52.07 L5.2
PGC1  (via drill 0.5 pad 1.02)
  Top 0.305: IC1.15 26.95,31.43 v25.72,31.43
  Bottom 0.305: v25.72,31.43 12.7,44.45 J2.5
PGD1  (via drill 0.5 pad 1.02)
  Top 0.305: IC1.16 26.07,29.84 v25.72,29.84
  Bottom 0.305: J2.4 13.65,41.91 v25.72,29.84
PWM_SIG1  (via drill 0.5, 0.5 pad 1.02)
  Top 0.305: IC1.42 39.05,49.19 v39.05,49.21 | IC2.40 67.03,44.73 v66.99,44.77
  Bottom 0.305: v39.05,49.21 42.86,45.4 44.45,46.99 51.44,46.99 53.02,45.4 55.88,45.4 56.52,46.04 66.67,46.04 66.83,45.88 66.99,45.72 v66.99,44.77
  Bottom 0.406: J10.3 67.63,46.67 66.83,45.88
PWM_SIG2  (via drill 0.5 pad 1.02)
  Top 0.305: IC2.39 67.68,44.19 v68.26,44.77 68.58,45.09 R30.2 | IC6.6 | IC6.6 IC6.7 | IC6.6 IC6.5 IC6.4 | IC6.6 57.16,59.38 55.88,58.1 55.88,52.39 54.61,51.12 54.61,47.31 54.93,46.99 56.2,46.99 57.15,46.04 v57.15,45.09
  Bottom 0.305: v68.26,44.77 68.26,44.13 67.94,43.81 65.72,43.81 65.72,44.45 64.77,45.4 58.1,45.4 57.78,45.09 v57.15,45.09
  Bottom 0.406: J10.1 79.06,41.59 75.56,45.09 68.58,45.09 v68.26,44.77
RB8
  Top 0.305: IC1.21 35.24,33.77 35.24,30.48 36.5,29.23 J11.4
RB9
  Top 0.305: IC1.22 35.88,33.85 35.88,33.34 38.19,31.02 J11.3
RB10
  Top 0.305: IC1.23 36.14,34.29 38.42,34.29 39.89,32.82 J11.2
RB11
  Top 0.305: IC1.24 36.21,34.92 41.59,34.92 41.9,34.61 J11.1
RD4
  Top 0.305: IC1.52 26.04,48.64 26.04,54.93 26.99,55.88 29.21,55.88 29.84,56.52 J3.1
RD5
  Top 0.305: IC1.53 25.4,48.57 25.4,55.88 27.3,57.78 J3.2
RD6
  Top 0.305: IC1.54 24.77,48.49 J3.3
SCL  (via drill 0.5, 0.5 pad 1.02)
  Top 0.305: 56.2,40.96 R6.1 | 56.2,40.96 58.1,40.96 59.12,41.98 IC2.2 | IC1.44 36.2,47.75 v36.2,48.58 | v46.04,38.73 46.67,38.1 49.21,38.1 50.16,39.05 54.61,39.05 56.2,40.64 56.2,40.96
  Bottom 0.305: v36.2,48.58 v46.04,38.73
SDA  (via drill 0.5, 0.5 pad 1.02)
  Top 0.305: v56.83,39.37 57.78,39.37 59.69,41.27 61.13,41.27 IC2.3 | IC1.43 37.15,47.99 v37.15,49.21 | v45.09,42.23 R5.1
  Bottom 0.305: v56.83,39.37 50.8,39.37 50.48,39.69 50.48,40.64 48.9,42.23 v45.09,42.23 44.13,42.23 v37.15,49.21
SUB+
  Top 0.305: IC6.35 71.37,61.98 71.44,61.91 71.44,61.28 71.44,60.96 70.51,60.03 IC6.32 | C37.2 74.28,63.19 D11.C
  Top 0.61: 71.44,61.28 C37.2 | D11.C D12.A 82.25,63.84 L6.1
SUB-
  Top 0.305: IC6.29 70.51,58.08 71.75,56.83 C38.1 | 73.07,56.13 IC6.26
  Top 0.61: C38.1 73.07,56.83 73.07,56.13 D10.A D9.C
  Top 1.016: D9.C 85.39,54.27 L5.1
SUB_ERROC  (via drill 0.5, 0.5 pad 1.02)
  Top 0.305: IC6.44 IC6.43 R27.1 60.01,66.04 54.61,60.64 54.61,52.07 48.9,46.35 48.9,45.72 v48.58,45.4 | IC1.28 38.09,35.88 v39.37,35.88 | v44.45,43.18 40.96,39.69 v40.96,38.73
  Bottom 0.305: v39.37,35.88 40.96,37.47 v40.96,38.73 | v48.58,45.4 48.58,43.81 47.94,43.18 v44.45,43.18
SUB_ERRUVTE  (via drill 0.5, 0.5 pad 1.02)
  Top 0.305: IC6.42 65.09,64.14 65.41,64.45 R28.1 68.26,66.04 68.9,66.67 68.9,68.58 68.26,69.22 63.18,69.22 62.87,68.9 59.37,68.9 54.61,64.14 52.07,64.14 51.75,63.82 51.75,60.64 53.02,60.64 53.98,59.69 53.98,52.39 48.26,46.67 48.26,46.35 47.31,45.4 42.86,45.4 v39.05,41.59 | IC1.29 38.16,36.51 38.73,36.51 v39.05,36.83
  Bottom 0.305: v39.05,36.83 40.01,37.78 40.01,39.69 40.32,40.01 40.64,40.01 v39.05,41.59
SUB_RST12  (via drill 0.5, 0.5 pad 1.02)
  Top 0.305: IC6.8 58.76,58.08 58.74,58.1 v57.15,58.1 | v25.08,46.04 25.08,45.35 IC1.58
  Bottom 0.305: v25.08,46.04 37.47,58.42 42.23,58.42 43.81,60.01 43.81,64.14 45.09,65.41 57.47,65.41 58.74,64.14 58.74,61.91 58.42,61.59 57.47,61.59 56.83,60.96 56.83,58.42 v57.15,58.1
SUB_RST34  (via drill 0.5, 0.5 pad 1.02)
  Top 0.305: v23.81,46.67 23.81,45.91 IC1.59 | IC6.46 62.49,64.4 v62.55,64.45
  Bottom 0.305: v23.81,46.67 24.13,46.99 24.77,46.99 37.15,59.37 41.91,59.37 43.18,60.64 43.18,64.45 44.77,66.04 61.91,66.04 62.55,65.41 v62.55,64.45
SUB_TWR  (via drill 0.5 pad 1.02)
  Top 0.305: IC2.42 65.73,45.09 66.36,45.72 69.53,45.72 v71.75,47.94 | IC6.41 65.72,63.3 65.72,63.82 66.67,64.77 67.94,64.77 70.17,66.99 v70.8,66.99
  Bottom 0.305: v71.75,47.94 71.75,51.75 74.3,54.29 74.3,63.5 | 74.3,63.5 v70.8,66.99 | 74.3,63.5 R29.1
USBD+
  Top 0.305: IC1.37 41.66,48.26 46.04,48.26 51.12,53.34 51.12,56.83 49.21,58.74 X1.3
USBD-
  Top 0.305: IC1.36 41.73,47.62 46.35,47.62 51.75,53.02 51.75,57.15 50.01,58.89 X1.2
USBID  (via drill 0.5 pad 1.02)
  Top 0.305: IC1.33 42.27,46.04 46.67,46.04 53.02,52.39 v53.02,59.05 | v47.62,59.05 48.41,59.84 X1.4
  Bottom 0.305: v53.02,59.05 51.44,59.05 | 51.44,59.05 v47.62,59.05 | 51.44,59.05 R17.1
VBUS
  Top 0.305: IC1.34 42.19,46.67 46.35,46.67 52.39,52.7 52.39,57.47 50.8,59.05 50.8,61.59 50.81,61.61 X1.1
VD_REG  (via drill 0.5, 0.5 pad 1.02)
  Top 0.305: 56.2,36.13 54.44,36.13 C2.1 54.19,32.54 C1.+ | 56.2,36.13 IC2.11 | IC6.11 58.17,56.13 v57.78,56.52 | v50.8,46.04 v53.66,48.9 | 56.2,36.13 v56.2,37.15
  Bottom 0.305: v57.78,56.52 59.05,55.24 59.05,54.29 58.26,53.5 | v53.66,48.9 58.26,53.5 | v50.8,46.04 50.48,45.72 50.48,42.23 52.07,40.64 58.1,40.64 58.1,38.73 57.47,38.1 56.52,38.1 56.2,37.78 v56.2,37.15 | C45.1 58.26,53.28 58.26,53.5
VDDCORE
  Top 0.305: IC1.56 26.67,45.17 26.67,45.72 23.53,48.86 C9.+
VIN  (via drill 0.5 pad 1.02)  (1 unrouted)
  Top 0.305: v74.93,30.16 69.85,30.16 68.98,31.03 IC2.24 69.44,34.83 69.53,34.92 69.53,35.38 IC2.25 | v76.2,38.73 v76.19,38.73 IC2.30 IC2.31 | IC6.36 70.25,62.63 71.12,63.5 | 69.32,59.05 IC6.30 | 69.32,59.05 IC6.31 | v71.12,59.05 69.32,59.05 | IC6.25 69.61,55.48 70.48,54.61 v70.48,53.98 | D10.C 73.95,50.48 | IC2.36 76.12,42.63
  Top 0.61: D12.C 79.38,66.04 72.71,66.04 71.75,65.09 v70.17,65.09
  Top 0.813: 71.12,63.5 70.17,64.45 v70.17,65.09
  Top 1.016: D8.C D6.C 27.01,17.46 v26.99,17.46 | J8.1 J8.3 J8.5 | v35.24,17.46 35.24,17.17 D4.C | D2.C 50.16,15.24 v52.39,17.46 | v76.2,42.86 76.2,48.6 D10.C 74.32,50.48 72.71,50.48 70.48,52.7 v70.48,53.98
  Bottom 0.305: 76.2,30.16 v74.93,30.16
  Bottom 0.813: v70.17,65.09 72.07,63.18 72.07,60.64 71.12,59.69 v71.12,59.05 71.12,54.61 v70.48,53.98
  Bottom 1.016: IC3.3 10.16,11.11 7.62,13.65 J8.5 4.45,16.41 C8.1 4.03,20.47 C5.+ 4.19,23.24 8.26,27.3 IC4.3 8.57,26.04 10.79,23.81 14.61,23.81 17.46,20.95 17.46,17.46 v26.99,17.46 v35.24,17.46 v43.5,17.46 v52.39,17.46 57.47,17.46 59.37,15.56 59.37,12.06 61.91,9.53 72.39,9.53 76.2,13.34 76.2,30.16 v76.2,38.73 v76.2,42.86

## Text on the board
tPlace: 1 | 1 | IC6 | 2 | 1 | C | 1 | PWM | 1 | + | + | - | - | IC2 | RB | IC1 | 11 | 10 | 9 | 8 | SUB | - | + | + | L | - | L | C | R | + | R | - | - | + | ECSE421 W2010 | Team 1